# EAGLE board V1P (EAGLE 7.5.0)
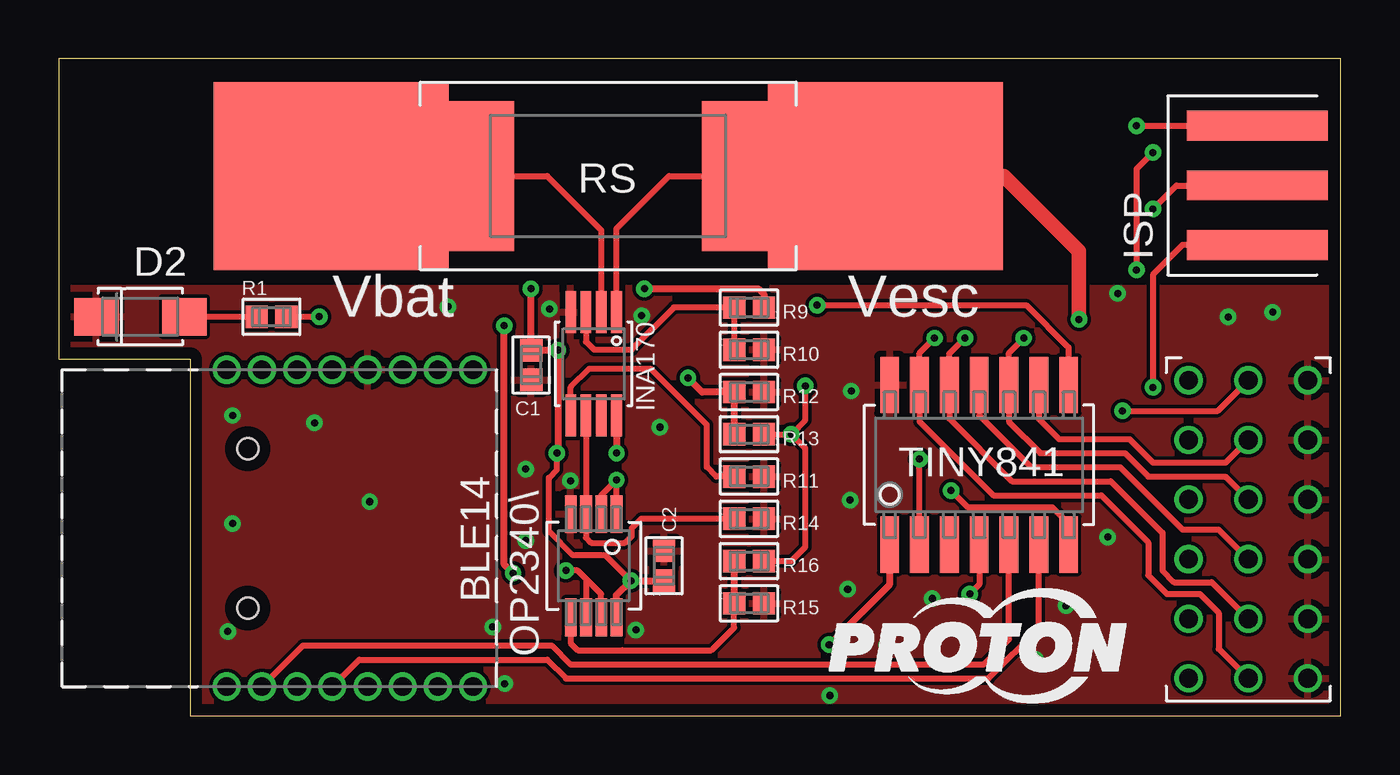
[diagram p0: board, top side]
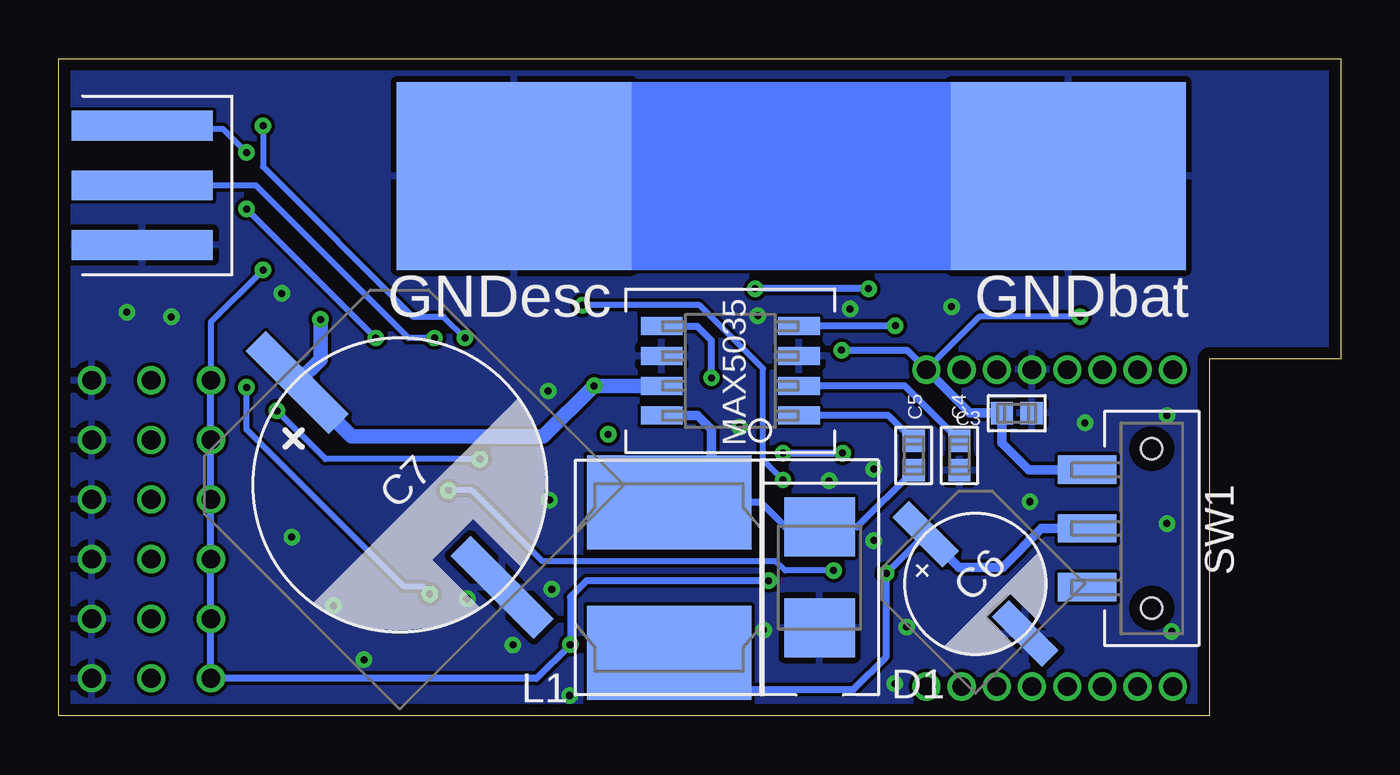
[diagram p1: board, bottom side, seen from below]

Size 54.6 x 28 mm. Coordinates in mm from the lower left corner, seen from the top.
Outline: 5.6,0 54.6,0 54.6,28 0,28 0,15.2 5.6,15.2 5.6,0
Copper layers (1*16): Top 0.035mm / dielectric 1.5mm / Bottom 0.035mm
Design rules "almiko": minimum track width 0.15mm, minimum drill 0.3mm, track to track 0.15mm, track to pad 0.15mm, pad to pad 0.15mm, via to via 0.15mm, smd to smd 0.15mm, copper to edge 0.5mm, drill to drill 0.35mm, minimum pad ring 0.2mm, minimum via ring 0.2mm, stop-mask expansion 0.1mm, vias tented up to drill 0.3mm, thermal gap 10mil

## Footprints (pad centres in the part's own frame; a part is rotated, then mirrored left to right if it is on the bottom)
HM17BLE = drill 0.8: P$1 -6.75,2.25; P$2 -6.75,0.75; P$3 -6.75,-0.75; P$4 -6.75,-2.25; P$5 -6.75,-3.75; P$6 -6.75,-5.25; P$7 -6.75,-6.75; P$8 -6.75,-8.25; P$9 6.75,-8.25; P$10 6.75,-6.75; P$11 6.75,-5.25; P$12 6.75,-3.75; P$13 6.75,-2.25; P$14 6.75,-0.75; P$15 6.75,0.75; P$16 6.75,2.25
0603L = smd 0.953 x 0.953: P$1 0.635,0; P$2 -0.635,0
RAD6.3MM = smd 1 x 3: P$1 0,3; P$2 0,-3
RAD12.5MM = smd 1.2 x 5: P$1 0,6.17; P$2 0,-6.17
DO-214AA = smd 2.5 x 3: P$1 -2.15,0; P$2 2.15,0
LED3.2X1.6MM = smd 1.9 x 1.6: P$1 -1.875,0; P$2 1.875,0
POWER8X10MM = smd 8 x 10: P$1 0,0
INA170 = smd 1.8 x 0.45: P$1 -2.2,0.975; P$2 -2.2,0.325; P$3 -2.2,-0.325; P$4 -2.2,-0.975; P$5 2.2,-0.975; P$6 2.2,-0.325; P$7 2.2,0.325; P$8 2.2,0.975
CON254MM08_2X3_EDGE = smd 6 x 1.27: P$1 0,2.54; P$3 0,0; P$5 0,-2.54 | smd 6 x 1.27 bottom: P$2 0,2.54; P$4 0,0; P$6 0,-2.54
CON254MM08_3X6 = drill 0.8: P$1 0,0; P$2 2.54,0; P$3 5.08,0; P$4 7.62,0; P$5 10.16,0; P$6 12.7,0; P$7 0,2.54; P$8 2.54,2.54; P$9 5.08,2.54; P$10 7.62,2.54; P$11 10.16,2.54; P$12 12.7,2.54; P$13 0,5.08; P$14 2.54,5.08; P$15 5.08,5.08; P$16 7.62,5.08; P$17 10.16,5.08; P$18 12.7,5.08
SRN8040 = smd 7 x 4: P$1 0,3.2; P$2 0,-3.2
NSOIC-8 = smd 1.778 x 0.762: P$1 -2.921,1.905; P$2 -2.921,0.635; P$3 -2.921,-0.635; P$4 -2.921,-1.905; P$5 2.921,-1.905; P$6 2.921,-0.635; P$7 2.921,0.635; P$8 2.921,1.905
SO-8 = smd 1.6 x 0.5: P$1 -2.2,0.975; P$2 -2.2,0.325; P$3 -2.2,-0.325; P$4 -2.2,-0.975; P$5 2.2,-0.975; P$6 2.2,-0.325; P$7 2.2,0.325; P$8 2.2,0.975
3921[1052METRIC] = smd 3 x 6.4: P$1 -5.5,0; P$2 5.5,0
JS102011 = smd 1.2 x 2.5: P$1 -2.5,2.75; P$2 0,2.75; P$3 2.5,2.75 | hole 0.9: 3.4,0; -3.4,0
SOIC14 = smd 2.4 x 0.8: P$1 -3.4,3.81; P$2 -3.4,2.54; P$3 -3.4,1.27; P$4 -3.4,0; P$5 -3.4,-1.27; P$6 -3.4,-2.54; P$7 -3.4,-3.81; P$8 3.4,-3.81; P$9 3.4,-2.54; P$10 3.4,-1.27; P$11 3.4,0; P$12 3.4,1.27; P$13 3.4,2.54; P$14 3.4,3.81

## Placement (x,y rotation side)
BLE14  HM-17BLE  [HM17BLE]  9.4,8 90 top
C1  0.1uF  [0603L]  20.12,14.95 90 top
C2  0.1uF  [0603L]  25.78,6.4 270 top
C3  0.1uF  [0603L]  13.8,12.9 180 bottom
C4  0.1uF  [0603L]  16.24,11.1 90 bottom
C5  0.1uF  [0603L]  18.19,11.1 90 bottom
C6  68uF  [RAD6.3MM]  15.56,5.63 45 bottom
C7  68uF  [RAD12.5MM]  40.08,9.84 45 bottom
D1  SCHOTTKY  [DO-214AA]  22.2,5.9 270 bottom
D2  SINGLELEDKP-3216SRC-PRV  [LED3.2X1.6MM]  3.48,17.01 180 top
GNDIN  POWERTAB  [POWER8X10MM]  11.6,23 90 bottom
GNDOUT  POWERTAB  [POWER8X10MM]  35.2,23 90 bottom
INA170  INA170  [INA170]  22.78,15 270 top
ISP  CON254_6WAY254-2X3-EDGE  [CON254MM08_2X3_EDGE]  51.04,22.6 0 top
J2  CON254_18WAY3X6  [CON254MM08_3X6]  53.2,1.6 90 top
L1  100uH  [SRN8040]  28.6,5.9 0 bottom
MAX5035  MAX5035  [NSOIC-8]  26,14.7 180 bottom
OP2340\  OPA2340  [SO-8]  22.78,6.4 270 top
R1  300  [0603L]  9.06,17.01 0 top
R9  10k  [0603L]  29.4,17.4 0 top
R10  10k  [0603L]  29.4,15.6 180 top
R11  25k  [0603L]  29.4,10.2 180 top
R12  25k  [0603L]  29.4,13.8 180 top
R13  25k  [0603L]  29.4,12 0 top
R14  25k  [0603L]  29.4,8.4 180 top
R15  10k  [0603L]  29.4,4.8 180 top
R16  150k  [0603L]  29.4,6.6 0 top
RS  0.001  [3921[1052METRIC]]  23.4,23 180 top
SW1  SWITCH-1P2T  [JS102011]  8.05,7.99 90 bottom
TINY841  ATTINY841  [SOIC14]  39.2,10.7 90 top
VIN  POWERTAB  [POWER8X10MM]  11.6,23 90 top
VOUT  POWERTAB  [POWER8X10MM]  35.2,23 90 top

## Library data of the parts
BLE14 = Shields
C1-C7 L1 R1 R9-R16 = RLC
D1 OP2340\ = Semiconductors
D2 = OptoElectronics
GNDIN GNDOUT ISP J2 VIN VOUT = Connectors
INA170 = VIP
MAX5035 = Power
RS = rcl
SW1 = Switches
TINY841 = MCU

## Nets
GND: BLE14.P$12 C1.P$2 C2.P$2 C3.P$2 C4.P$2 C6.P$2 C7.P$2 D1.P$2 D2.P$2 GNDIN.P$1 GNDOUT.P$1 INA170.P$4 ISP.P$6 J2.P$1 J2.P$2 J2.P$3 J2.P$4 J2.P$5 J2.P$6 MAX5035.P$3 MAX5035.P$6 OP2340\.P$4 R10.P$2 R11.P$2 R12.P$2 R14.P$2 R15.P$2 TINY841.P$14
IMEASURE: OP2340\.P$1 OP2340\.P$2 TINY841.P$8
MISO: ISP.P$1 J2.P$7 TINY841.P$13
MOSI: ISP.P$4 J2.P$8 TINY841.P$12
N$1: MAX5035.P$5 R12.P$1 R13.P$2
N$3: INA170.P$6 OP2340\.P$3 R14.P$1
N$4: INA170.P$5 R11.P$1
N$5: INA170.P$3 R9.P$2 R10.P$1
N$6: C4.P$1 MAX5035.P$2
N$7: INA170.P$2 RS.P$2 VIN.P$1
N$8: C5.P$2 D1.P$1 L1.P$1 MAX5035.P$8
N$9: C5.P$1 MAX5035.P$1
N$10: J2.P$9 TINY841.P$11
N$11: OP2340\.P$5 R15.P$1 R16.P$2
N$12: C6.P$1 L1.P$2 MAX5035.P$4 SW1.P$2
N$13: J2.P$11 TINY841.P$9
N$14: D2.P$1 R1.P$2
N$16: J2.P$12 TINY841.P$2
RESET: ISP.P$5 TINY841.P$4
SCK: ISP.P$3 J2.P$10 TINY841.P$10
TOAT: BLE14.P$2 TINY841.P$5
TOBLE: BLE14.P$4 TINY841.P$6
V+: C7.P$1 INA170.P$1 MAX5035.P$7 R13.P$1 R16.P$1 RS.P$1 VOUT.P$1
VCC: BLE14.P$9 C1.P$1 C2.P$1 C3.P$1 INA170.P$8 ISP.P$2 J2.P$13 J2.P$14 J2.P$15 J2.P$16 J2.P$17 J2.P$18 OP2340\.P$8 R1.P$1 R9.P$1 SW1.P$3 TINY841.P$1
VMEASURE: OP2340\.P$6 OP2340\.P$7 TINY841.P$7

## Tracks (layer width: path | path; a pad name or v marks a point on that pad's centre or on a via)
GND  (via drill 0.3)
  other vias: 25.6,12.3 7.4,12.8 7.4,8.2 7.2,3.6 10.9,12.48 13.24,9.13 33.7,9.2 16.57,17.43 45.1,18 49.8,17 51.7,17.2 20.9,17.34 33.6,5.4 37.2,5 42.9,4.7 21.79,10.01 19.88,10.52 24.83,17.05 19.88,7.47 18.49,3.79 19,1.38 24.58,3.66 32.84,0.87 35.25,3.03 41.6,2.39 44.68,7.62 33.76,13.84
  pour Top: 5.6,0 54.6,0 54.6,18.2 0,18.2 0,15.2 5.6,15.2
  pour Bottom: 5.6,0 54.6,0 54.6,28 0,28 0,15.2 5.6,15.2
IMEASURE  (via drill 0.3)
  Top 0.254: OP2340\.P$1 v23.76,10.05 23.11,9.41 OP2340\.P$2 | v32.3,17.5 41.2,17.5 43,15.7 TINY841.P$8
  Top 0.305: TINY841.P$8
  Bottom 0.254: v23.76,10.05 24.6,10.9 24.6,14.8 27.3,17.5 v32.3,17.5
MISO  (via drill 0.3)
  Top 0.254: J2.P$7 49.4,2.86 49.4,4.4 48.6,5.2 47.2,5.2 46.4,6 46.4,7.4 44.4,9.4 39.8,9.4 36.66,12.54 TINY841.P$13 36.66,15.46 v37.3,16.1 | v45.9,25.14 ISP.P$1
  Top 0.305: 50.9,25 ISP.P$1
  Bottom 0.254: v37.3,16.1 38.2,17 39.5,17 45.9,23.4 v45.9,25.14
MOSI  (via drill 0.3)
  Top 0.254: J2.P$8 49.1,5.7 47.5,5.7 47,6.2 47,7.8 44.8,10 40.6,10 37.93,12.67 TINY841.P$12 37.93,15.43 v38.6,16.1
  Bottom 0.254: v38.6,16.1 39.7,16.1 46.2,22.6 ISP.P$4
N$1  (via drill 0.3)
  Top 0.305: R13.P$2 R12.P$1 27.4,13.8 v26.8,14.4
  Bottom 0.305: v26.8,14.4 26.8,16 27.4,16.6 MAX5035.P$5
N$3
  Top 0.254: INA170.P$6 OP2340\.P$3 22.45,7.6 22.67,7.38 24.13,7.38 24.4,7.65 24.4,8 24.8,8.4 R14.P$1
N$4
  Top 0.254: INA170.P$5 21.8,14.01 22.6,14.8 25.2,14.8 27.6,12.4 27.6,10.6 28,10.2 R11.P$1
N$5
  Top 0.254: INA170.P$3 22.45,15.95 22.8,15.6 24.4,15.6 26.2,17.4 R9.P$2 R10.P$1
N$6
  Bottom 0.305: MAX5035.P$2 18.57,14.06 C4.P$1
N$7
  Top 0.254: RS.P$2 20.8,23 23.11,20.69 INA170.P$2
  Top 0.406: VIN.P$1 RS.P$2
N$8
  Bottom 0.305: L1.P$1 24.7,9.1 23.65,8.05 D1.P$1 20.6,8.05 C5.P$2
  Bottom 0.406: MAX5035.P$8 27.4,12.8 26.8,12.2 26.8,9.1 L1.P$1
N$9
  Bottom 0.305: MAX5035.P$1 19.25,12.8 C5.P$1
N$10
  Top 0.254: TINY841.P$11 39.2,12.8 41.4,10.6 45.2,10.6 47.85,7.95 49.39,7.95 J2.P$9
N$11
  Top 0.254: OP2340\.P$5 21.8,3.09 22.1,2.8 24,2.8 27.8,2.8 28.77,3.77 R15.P$1
  Top 0.305: R16.P$2 R15.P$1
N$12  (via drill 0.3)
  Top 0.305: v19.35,6.08 18.97,6.46 v18.97,16.63
  Bottom 0.305: L1.P$2 27.03,1.13 20.75,1.13 19.35,2.53 v19.35,6.08 C6.P$1 | v18.97,16.63 18.99,16.6 MAX5035.P$4
  Bottom 0.406: SW1.P$2 12.75,7.99 14.4,6.34 16.27,6.34 C6.P$1
N$13
  Top 0.254: TINY841.P$9 41.74,12.66 42.6,11.8 45.6,11.8 46.6,10.8 49.7,10.8 J2.P$11
N$14
  Top 0.254: D2.P$1 R1.P$2
N$16  (via drill 0.3)
  Top 0.254: TINY841.P$2 v36.66,10.94 | v45.3,13 49.36,13 J2.P$12
  Bottom 0.254: v36.66,10.94 43.24,10.94 v45.3,13
RESET  (via drill 0.3)
  Top 0.254: TINY841.P$4 39.2,5.6 v38.8,5.2 | ISP.P$5 47.86,20.06 46.6,18.8 v46.6,14
  Bottom 0.254: v38.8,5.2 39.1,5.5 39.9,5.5 46.6,12.2 v46.6,14
SCK  (via drill 0.3)
  Top 0.254: J2.P$10 49.68,10.2 46.4,10.2 45.4,11.2 41.8,11.2 40.47,12.53 TINY841.P$10 40.47,15.47 v41.1,16.1 | v46.6,21.6 47.6,22.6 ISP.P$3
  Bottom 0.254: v41.1,16.1 v46.6,21.6
TOAT
  Top 0.254: BLE14.P$2 10.4,3 21,3 21.8,2.2 39.4,2.2 40.47,3.27 TINY841.P$5
TOBLE
  Top 0.254: BLE14.P$4 12.8,2.4 20.8,2.4 21.6,1.6 39.6,1.6 41.74,3.74 TINY841.P$6
V+  (via drill 0.3)
  Top 0.254: INA170.P$1 23.76,20.75 26,23 28.4,23 | R13.P$1 v31.2,12 | R16.P$1 31.2,6.6 31.8,7.2 31.8,11.4 v31.2,12 | v31.2,12 31.8,12.6 v31.8,14.06
  Top 0.305: 28.4,23 RS.P$1
  Top 0.406: VOUT.P$1 28.4,23
  Top 0.61: VOUT.P$1 40.25,23 43.45,19.8 v43.45,16.89
  Bottom 0.61: MAX5035.P$7 v31.8,14.06 33.97,11.9 42.13,11.9 C7.P$1 43.45,15.19 v43.45,16.89
VCC  (via drill 0.3)
  Top 0.254: v46.6,24 45.9,23.3 v45.9,19 | R1.P$1 v11.1,17.01 | v24.37,5.77 23.28,6.85 21.89,6.85 20.88,7.86 20.88,10.15 21.22,10.49 v21.22,11.2
  Top 0.305: OP2340\.P$8 23.76,5.16 v24.37,5.77 C2.P$1 | R9.P$1 30.04,17.97 29.8,18.2 v24.94,18.2 | 21.2,11.2 v21.22,11.2 21.26,11.24 v21.26,15.59 C1.P$1 | INA170.P$8 v23.76,11.2 | v32.81,3.04 35.39,5.62 TINY841.P$1 | C1.P$1 v20.11,18.2
  Top 0.406: C1.P$1
  Bottom 0.254: v46.6,24 47.6,25 50.9,25 ISP.P$2 | v45.9,19 48.12,16.78 J2.P$18 | v11.1,17.01 15.39,17.01 BLE14.P$9
  Bottom 0.305: J2.P$18 J2.P$17 J2.P$16 J2.P$15 J2.P$14 J2.P$13 34.25,1.6 v32.81,3.04 32.81,5.07 32.12,5.77 v24.37,5.77 | v23.76,11.2 v21.22,11.2 | v20.11,18.2 v24.94,18.2 | v21.26,15.59 18.48,15.59 BLE14.P$9
  Bottom 0.406: BLE14.P$9 15.8,12.9 C3.P$1 14.44,11.63 13.29,10.49 SW1.P$3
VMEASURE  (via drill 0.3)
  Top 0.254: OP2340\.P$7 23.11,5.2 22.45,5.84 | 22.45,5.84 OP2340\.P$6 | v38,9.6 38.7,8.9 42.3,8.9 43.01,8.19 TINY841.P$7 | 22.45,5.84 22.1,6.2 v21.6,6.2
  Bottom 0.254: v38,9.6 37,9.6 33.99,6.59 24.05,6.59 23.66,6.2 v21.6,6.2
(copper drawn outside any net)
  shapes: Bottom area x1

## Text on the board
tNames: Vbat | Vesc
bNames: GNDbat | GNDesc